# Altium PCB CW308T_AURIX.PcbDoc
Units mil, origin at the board's own origin, x right, y up, seen from the top; angles counter-clockwise.
Board outline 2055 x 2540 mil, 2 copper layers (Top Layer, Bottom Layer); 24 components, 26 nets, 219 pads, 121 vias.
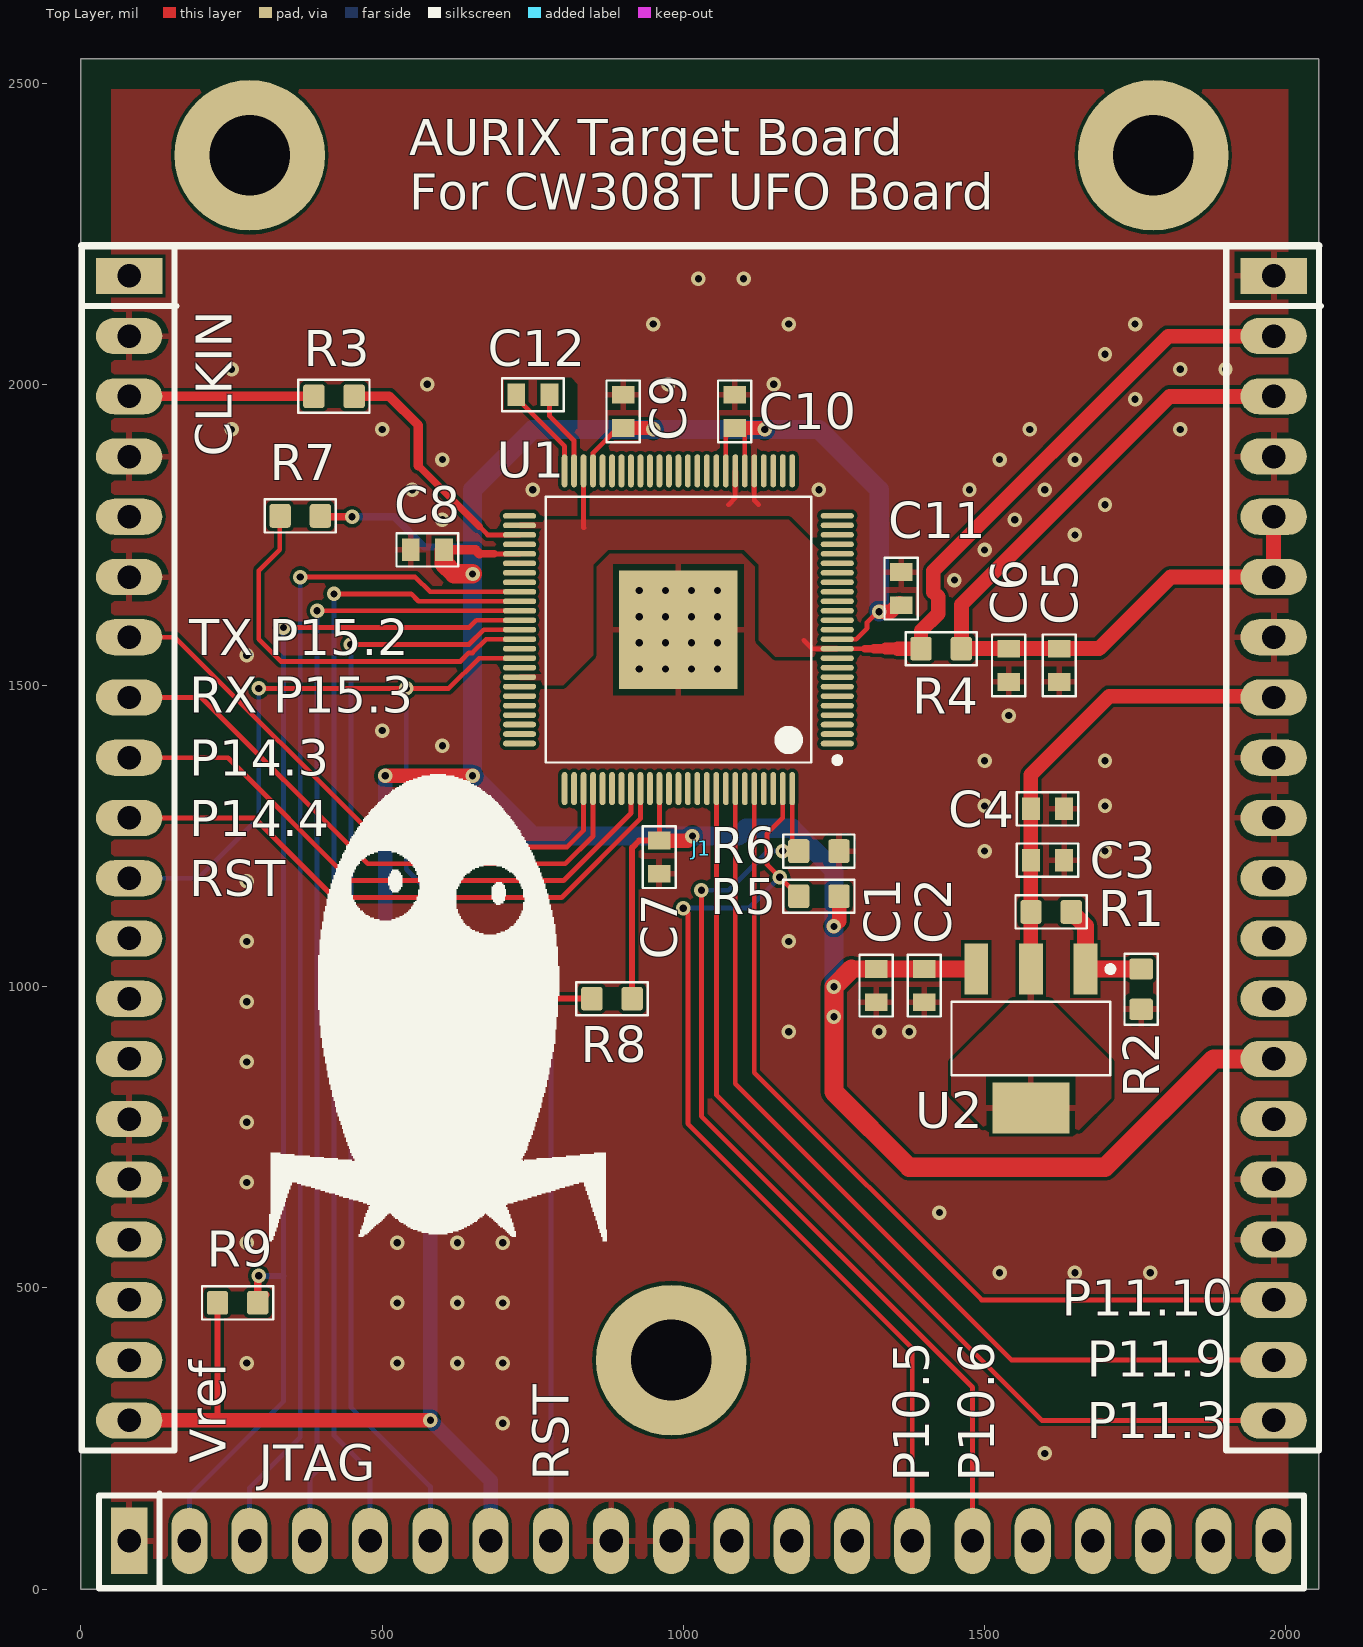
[diagram p0: Top Layer view]
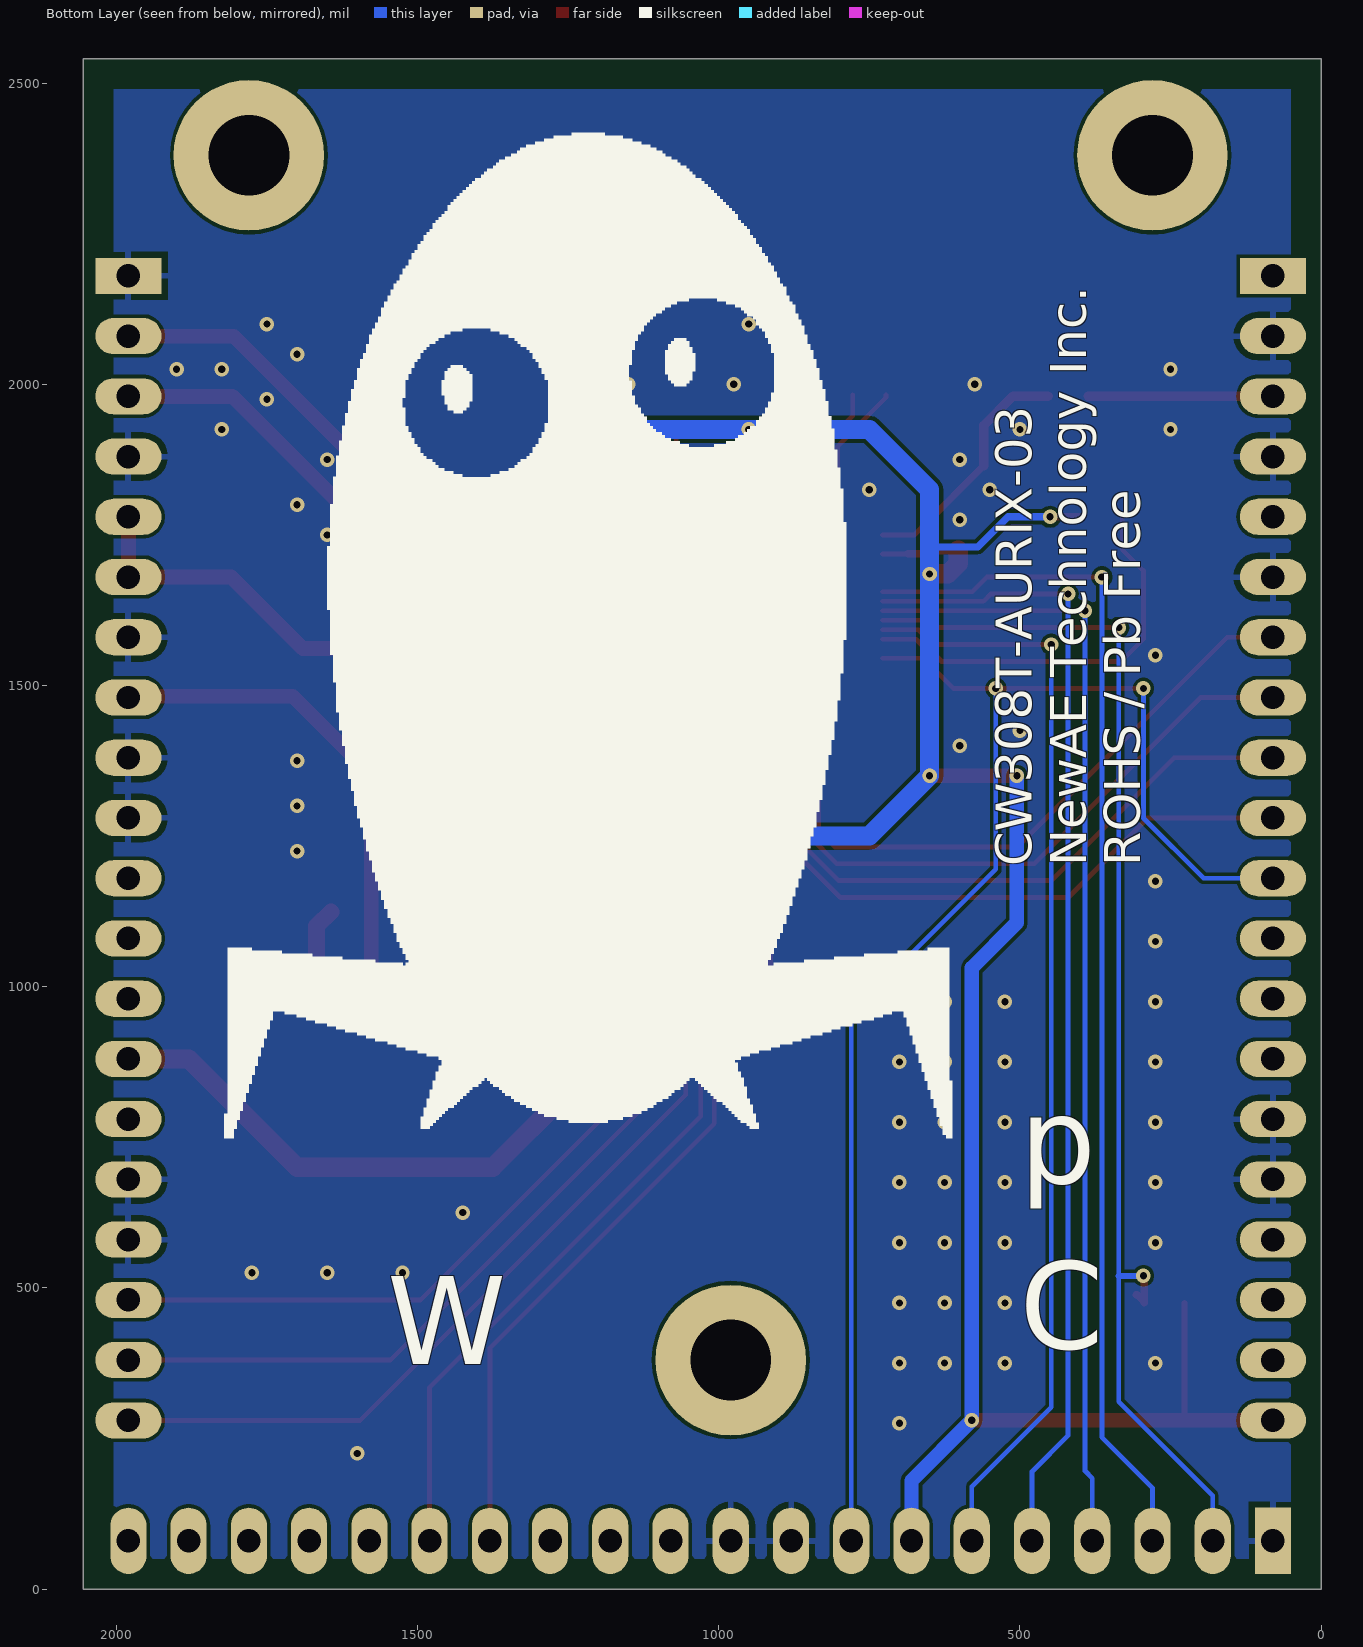
[diagram p1: Bottom Layer view, seen from below]

## Layer stack, top to bottom
Top Solder: solder mask 0.4, Solder Resist, Dk 3.5
Top Layer: signal copper 1.4
Dielectric 1: dielectric 12.6, FR-4, Dk 4.8
Bottom Layer: signal copper 1.4
Bottom Solder: solder mask 0.4, Solder Resist, Dk 3.5

## Board outline
0,0 2055,0 2055,2540 0,2540

## Design rules (kind name [scope] priority, off if disabled: settings)
BoardOutlineClearance Silk_to_Outline [(OnLayer('Top Overlay'))] p1: gap=0 ignorepadtopadclearanceinfootprint=FALSE
BoardOutlineClearance [All] p2: gap=50 ignorepadtopadclearanceinfootprint=FALSE
Clearance [All] p1: gap=6 ignorepadtopadclearanceinfootprint=FALSE except(0: Arc-Hole Track-Hole SMDPad-Hole THPad-Hole Via-Hole Fill-Hole Poly-Hole Region-Hole Text-Hole)
HoleSize [All] p1: absolutevalues=TRUE maxlimit=200 minlimit=1 maxpercent=80.000 minpercent=20.000
MinimumSolderMaskSliver [All] p1: minsoldermaskwidth=5
PlaneConnect PlaneConnect_viaDirect [IsVia] p1: planeconnectstyle=Direct reliefexpansion=20 reliefentries=4 reliefconductorwidth=10 reliefairgap=10
PlaneConnect [All] p2: planeconnectstyle=Relief reliefexpansion=20 reliefentries=4 reliefconductorwidth=10 reliefairgap=10
PolygonConnect PolygonConnect_1 [InNet('+1v3')] p1: connectstyle=Direct reliefconductorwidth=10 reliefentries=4 polygonreliefangle="90 Angle" airgapwidth=10
PolygonConnect PolygonConnect_viaDirect [All vs isVia] p2: connectstyle=Direct reliefconductorwidth=10 reliefentries=4 polygonreliefangle="90 Angle" airgapwidth=10
PolygonConnect [All] p3: connectstyle=Relief reliefconductorwidth=10 reliefentries=4 polygonreliefangle="90 Angle" airgapwidth=10
RoutingVias [All] p1: holewidth=28 width=50 viastyle="Through Hole" minholewidth=28 minwidth=50 maxholewidth=28 maxwidth=50 useviatemplates=TRUE viatemplateguid#1={9AA9326F-178A-41E1-B0FF-219260E0CFB2} viatemplateguid#2={C4BA5539-22F4-42F7-B53A-49D4B5D09D5C} viatemplateguid#3={5162F4C7-3166-4B30-8273-EF702488B20E} viatemplatename#1=v61h30m0mx0 viatemplatename#2=v86h41m0mx0 viatemplatename#3=v127h71m0mx0
SilkToSilkClearance [All] p1: silktosilkclearance=5
SilkToSolderMaskClearance [IsPad] p1: minsilkscreentomaskgap=5 clearancetoexposedcopper=TRUE
SolderMaskExpansion [All] p1: expansion=4
Width [All] p1: maxlimit=100 minlimit=6 preferedwidth=8 minimp=50.000000 maximp=50.000000 favimp=50.000000
25 further rules are at their usual default settings.

## Components (designator, comment, footprint, x,y, rotation, side; value= is the part's Value field where it differs from the comment)
C1 "2u2" CAPC0603_M 1320,1001.6 r270 top
C2 "2u2" CAPC0603_M 1400,1001.6 r270 top
C3 "2u2" CAPC0603_M 1604.56,1210 r0 top
C4 "2u2" CAPC0603_M 1604.56,1295 r0 top
C5 "2u2" CAPC0603_M 1624,1533.45 r270 top
C6 "100n" CAPC0603_M 1540,1533.45 r270 top
C7 "100n" CAPC0603_M 960,1215 r270 top
C8 "100n" CAPC0603_M 575,1725 r180 top
C9 "100n" CAPC0603_M 900,1955 r90 top
C10 "100n" CAPC0603_M 1085,1955 r90 top
C11 "100n" CAPC0603_M 1361.42,1660.72 r90 top
C12 "2u2" CAPC0603_M 750,1982.56 r180 top
J1 "CW308_TARGETCON" CW308_TBOARD_CONN 80,2180 r0 top locked
R1 "680R" RESC1608X55N 1610.46,1124 r0 top
R2 "120R" RESC1608X55N 1760,995.69 r270 top
R3 "22R" RESC1608X55N 420,1980 r180 top
R4 "5R1" RESC1608X55N 1428,1561.01 r180 top
R5 "10k" RESC1608X55N 1225,1150 r180 top
R6 "10k" RESC1608X55N 1225,1225 r180 top
R7 "10k" RESC1608X55N 364,1781.48 r0 top
R8 "10k" RESC1608X55N 881.54,980 r180 top
R9 "10k" RESC1608X55N 260,475 r0 top
U1 "TC233LP" PG-TQFP-100-23 991.78,1592.5 r180 top
U2 "LD1117SC-R" SOT-223 1577,914 r270 top

## Footprints (in the part's own frame and the unit in brackets; to place one, negate y for a bottom-side part, rotate by r counter-clockwise, add the part's x,y. Pads: shape width x height; smd on the part's side, far side on the other; paste and mask are expansions set on the pad)
CAPC0603_M [mm]
  rect 0.75x0.95 smd: 1(-0.7,0) 2(0.7,0)
  silkscreen extent -1.3,-0.7 1.3,0.7, body extent -0.85,-0.45 0.85,0.45, height 0.9
CW308_TBOARD_CONN [mil]
  rect 110x60 hole 39: A1(0,0) C1(1900,0)
  oval 110x60 hole 39: A2(0,-100) A3(0,-200) A4(0,-300) A5(0,-400) A6(0,-500) A7(0,-600) A8(0,-700) A9(0,-800) A10(0,-900) A11(0,-1000) A12(0,-1100) A13(0,-1200) A14(0,-1300) A15(0,-1400) A16(0,-1500) A17(0,-1600) A18(0,-1700) A19(0,-1800) A20(0,-1900) C2(1900,-100) C3(1900,-200) C4(1900,-300) C5(1900,-400) C6(1900,-500) C7(1900,-600) C8(1900,-700) C9(1900,-800) C10(1900,-900) C11(1900,-1000) C12(1900,-1100) C13(1900,-1200) C14(1900,-1300) C15(1900,-1400) C16(1900,-1500) C17(1900,-1600) C18(1900,-1700) C19(1900,-1800) C20(1900,-1900)
  rect 60x110 hole 39: B1(0,-2100)
  oval 60x110 hole 39: B2(100,-2100) B3(200,-2100) B4(300,-2100) B5(400,-2100) B6(500,-2100) B7(600,-2100) B8(700,-2100) B9(800,-2100) B10(900,-2100) B11(1000,-2100) B12(1100,-2100) B13(1200,-2100) B14(1300,-2100) B15(1400,-2100) B16(1500,-2100) B17(1600,-2100) B18(1700,-2100) B19(1800,-2100) B20(1900,-2100)
  round 250 hole 134: MH1(200,200) MH2(900,-1800) MH2(1700,200)
  silkscreen extent -79,-2179 1979,50, body extent -50,-2149 1950,50, height 48
PG-TQFP-100-23 [mm] "TSQFP, 100-Leads, Body 12.00x12.00mm, Pitch 0.40mm, Thermal Pad 5.00x5.00mm, IPC Medium Density"
  oval 1.4x0.24 smd paste-0.038: 1(-6.7,4.8) 2(-6.7,4.4) 3(-6.7,4) 4(-6.7,3.6) 5(-6.7,3.2) 6(-6.7,2.8) 7(-6.7,2.4) 8(-6.7,2) 9(-6.7,1.6) 10(-6.7,1.2) 11(-6.7,0.8) 12(-6.7,0.4) 13(-6.7,0) 14(-6.7,-0.4) 15(-6.7,-0.8) 16(-6.7,-1.2) 17(-6.7,-1.6) 18(-6.7,-2) 19(-6.7,-2.4) 20(-6.7,-2.8) 21(-6.7,-3.2) 22(-6.7,-3.6) 23(-6.7,-4) 24(-6.7,-4.4) 25(-6.7,-4.8) 51(6.7,-4.8) 52(6.7,-4.4) 53(6.7,-4) 54(6.7,-3.6) 55(6.7,-3.2) 56(6.7,-2.8) 57(6.7,-2.4) 58(6.7,-2) 59(6.7,-1.6) 60(6.7,-1.2) 61(6.7,-0.8) 62(6.7,-0.4) 63(6.7,0) 64(6.7,0.4) 65(6.7,0.8) 66(6.7,1.2) 67(6.7,1.6) 68(6.7,2) 69(6.7,2.4) 70(6.7,2.8) 71(6.7,3.2) 72(6.7,3.6) 73(6.7,4) 74(6.7,4.4) 75(6.7,4.8)
  oval 0.24x1.4 smd paste-0.038: 26(-4.8,-6.7) 27(-4.4,-6.7) 28(-4,-6.7) 29(-3.6,-6.7) 30(-3.2,-6.7) 31(-2.8,-6.7) 32(-2.4,-6.7) 33(-2,-6.7) 34(-1.6,-6.7) 35(-1.2,-6.7) 36(-0.8,-6.7) 37(-0.4,-6.7) 38(0,-6.7) 39(0.4,-6.7) 40(0.8,-6.7) 41(1.2,-6.7) 42(1.6,-6.7) 43(2,-6.7) 44(2.4,-6.7) 45(2.8,-6.7) 46(3.2,-6.7) 47(3.6,-6.7) 48(4,-6.7) 49(4.4,-6.7) 50(4.8,-6.7) 76(4.8,6.7) 77(4.4,6.7) 78(4,6.7) 79(3.6,6.7) 80(3.2,6.7) 81(2.8,6.7) 82(2.4,6.7) 83(2,6.7) 84(1.6,6.7) 85(1.2,6.7) 86(0.8,6.7) 87(0.4,6.7) 88(0,6.7) 89(-0.4,6.7) 90(-0.8,6.7) 91(-1.2,6.7) 92(-1.6,6.7) 93(-2,6.7) 94(-2.4,6.7) 95(-2.8,6.7) 96(-3.2,6.7) 97(-3.6,6.7) 98(-4,6.7) 99(-4.4,6.7) 100(-4.8,6.7)
  rect 5x5 smd paste-10: 101(0,0)
  silkscreen extent -6.83,-5.6 5.6,5.62, body extent -7,-7 7,7, height 1.2
RESC1608X55N [mm] "Chip Resistor, Body 1.6x0.8mm, EIA 0603, IPC Medium Density"
  round 0.254 on Mech15: 0(0,0)
  rrect25% 0.9x1 smd: 1(-0.85,0) 2(0.85,0)
  Top Layer pour cut-out: -0.6,0.5 0.6,0.5 0.6,-0.5 -0.6,-0.5
  silkscreen extent -1.5,-0.7 1.5,0.7, body extent -0.87,-0.47 0.88,0.48, height 0.54
SOT-223 [mm] "SOT223, 4-Leads, Body 6.50x7.00mm (avg), Pitch 2.30mm, IPC Medium Density"
  rect 2.15x1 smd: 1(-2.925,2.3) 2(-2.925,0) 3(-2.925,-2.3)
  rect 2.15x3.25 smd: 4(2.925,0)
  silkscreen extent -3.05,-3.35 1.55,3.48, body extent -3.5,-3.35 3.5,3.35, height 1.8

## Part data
C1 C2 C3 C4 C5 C12: library part CCHIP-2u2-0603, "2u2, 0603", Case-EIA=0603, Case-Metric=1608, Manufacture 1=Samsung, Manufacture Part Number 1=CL10B225KP8NNNC, Rated Voltage=10VDC, Supplier Part Number 1=1276-1134-2-ND, Component Group=Capacitor, Component Type=Standard, Mounting Technology=SMT, Part Number=CCHIP-2u2-0603, Pin Count=2, Supplier 1=Digi-Key
C6 C7 C8 C9 C10 C11: library part CCHIP-100n-0603, "100n, 0603", Case-EIA=0603, Case-Metric=1608, Manufacture 1=Kemet, Manufacture Part Number 1=C0603C104K5RACTU, Rated Voltage=50VDC, Supplier Part Number 1=399-5089-2-ND, Component Group=Capacitor, Component Type=Standard, Mounting Technology=SMT, Part Number=CCHIP-100n-0603, Pin Count=2, Supplier 1=Digi-Key
J1: library part CW308_TBOARD, "CW308 \"Standard\" Target Board Connector", Component Group=Mechanical, Component Type=Standard, Mounting Technology=Through-hole, Part Number=CW308_TBOARD, Pin Count=60, Pitch=2.54mm
R1: library part RCHIP-680R-0603, "680R res, 0603, 1%, 1/10W", Case-EIA=0603, Case-Metric=1608, Manufacture 1=Yageo, Manufacture Part Number 1=RC0603FR-07680RL, Rated Power=0.1W, Rated Voltage=75VDC, Supplier Part Number 1=311-680HRCT-ND, Temperature Range="-55C to 155C", Tolerance=1%, Component Group=Resistor, Component Type=Standard, Mounting Technology=SMT, Part Number=RCHIP-680R-0603, Pin Count=2, Supplier 1=Digi-Key
R2: library part RCHIP-120R-0603, "120R res, 0603, 1%, 1/10W", Case-EIA=0603, Case-Metric=1608, Manufacture 1=Yageo, Manufacture Part Number 1=RC0603FR-07120RL, Rated Power=0.1W, Rated Voltage=75VDC, Supplier Part Number 1=311-120HRCT-ND, Temperature Range="-55C to 155C", Tolerance=1%, Component Group=Resistor, Component Type=Standard, Mounting Technology=SMT, Part Number=RCHIP-120R-0603, Pin Count=2, Supplier 1=Digi-Key
R3: library part RCHIP-22R-0603, "22R res, 0603, 1%, 1/10W", Case-EIA=0603, Case-Metric=1608, Manufacture 1=Yageo, Manufacture Part Number 1=RC0603FR-0722RL, Rated Power=0.1W, Rated Voltage=75VDC, Supplier Part Number 1=311-22.0HRCT-ND, Temperature Range="-55C to 155C", Tolerance=1%, Component Group=Resistor, Component Type=Standard, Mounting Technology=SMT, Part Number=RCHIP-22R-0603, Pin Count=2, Supplier 1=Digi-Key
R4: library part RCHIP-5R1-0603, "5R1 res, 0603, 1%, 1/10W", Case-EIA=0603, Case-Metric=1608, Manufacture 1=Yageo, Manufacture Part Number 1=RC0603FR-075R1L, Rated Power=0.1W, Rated Voltage=75VDC, Supplier Part Number 1=YAG3372CT-ND, Temperature Range="-55C to 155C", Tolerance=1%, Component Group=Resistor, Component Type=Standard, Mounting Technology=SMT, Part Number=RCHIP-5R1-0603, Pin Count=2, Supplier 1=Digi-Key
R5 R6 R7 R8 R9: library part RCHIP-10K-0603, "10k res, 0603, 1%, 1/10W", Case-EIA=0603, Case-Metric=1608, Manufacture 1=Yageo, Manufacture Part Number 1=RC0603FR-0710KL, Rated Power=0.1W, Rated Voltage=75VDC, Supplier Part Number 1=311-10.0KHRCT-ND, Temperature Range="-55C to 155C", Tolerance=1%, Component Group=Resistor, Component Type=Standard, Mounting Technology=SMT, Part Number=RCHIP-10K-0603, Pin Count=2, Supplier 1=Digi-Key
U1: "IC MCU 32BIT 2MB FLASH 100TQFP", Manufacture 1="Infineon Technologies", Manufacture Part Number 1=TC233LP32F200FABKXUMA1, Supplier Part Number 1=TC233LP32F200FABKXUMA1CT-ND, Component Group="Digital IC", Component Type=Standard, Mounting Technology=SMT, Part Number=TC233LP, Pin Count=100, PP Material Stack=0, PP Rotation=0, RoHS=Yes, Supplier 1=Digi-Key

## Via types
v1: diameter 24, hole 12, Top Layer to Bottom Layer, tented both sides, 105 vias
v2: diameter 19.68, hole 12, Top Layer to Bottom Layer, 16 vias

## Nets (pads, with @x,y where several pads share a name; then routed paths per layer and width w, separated by ;. In a path a pad name is that pad's centre, name@x,y a point inside that pad or via, vN(x,y) a via of type N, cw(c..) or ccw(c..) an arc to the next point about the centre after c; other vN are vias at no path point)
+1v5: C3.1 C4.1 J1.C8 R1.1 U2.2 U2.4 | length 780.7
  Top Layer w24: U2.2 R1.1 C3.1 C4.1 1577,1352 1707.27,1482.27 1977.73,1482.27 J1.C8
+3v3: C1.1 C2.1 C7.1 C8.1 C9.1 C10.1 C11.1 J1.A20 J1.B7 J1.C14 R5.1 R7.2 R8.1 R9.1 U1.12 U1.31 U1.33 U1.47 U1.55 U1.86 U2.3 | length 7281.1
  Top Layer w8: 686.51,1718.49 U1.55 ; U1.47 850.05,1886.05 891.44,1927.44 C9.1 ; C7.1 960.28,1242.84 U1.86 ; U1.33 1070.52,1912.96 C10.1 ; U1.31 1102.02,1924.46 1105,1927.44 ; U1.12 1286.76,1576.76 1305,1595 1305,1605 1322.44,1622.44 v1(1325,1622.44)
  Top Layer w10: 220,280 226.54,286.54 R9.1 ; 308.46,278.46 310,280 ; R8.1 915.01,1230.91 926.66,1242.56 C7.1
  Top Layer w12: R7.2 398.94,1780 v1(450,1780) ; 661.51,1718.49 686.51,1718.49
  Top Layer w16: C8.1 655,1725 661.51,1718.49
  Top Layer w24: J1.A20 220,280 310,280 v1(580,280) ; v1(505,1350) v1(650,1350) ; C9.1 947.56,1927.44 v1(950,1925) ; C7.1 1007.56,1242.56 v1(1015,1250) ; C10.1 1105,1927.44 1132.56,1927.44 v1(1135,1925) ; v1(1250,1100) 1258.46,1108.46 R5.1 ; v1(1325,1622.44) 1344.37,1622.44 C11.1@1358.25,1636.33
  Top Layer w28: 1279.16,1029.16 C1.1 C2.1 U2.3
  Top Layer w32: C8.1 602.56,1702.44 619.5,1685.5 v1@650,1685.5 ; 1279.16,1029.16 v1(1250,1000) v1(1250,950) 1250,825 1375,700 1700,700 1880,880 J1.C14
  Bottom Layer w12: v1(450,1780) 520,1780 570,1730 650,1730
  Bottom Layer w24: v1(505,1350) 505,1106.03 580,1031.03 v1(580,280) 680,180 J1.B7
  Bottom Layer w32: v1(1250,950) v1(1250,1000) v1(1250,1100) 1250,1193.74 1180.74,1263 1104.37,1263 1091.37,1250 v1(1015,1250) 750,1250 v1(650,1350) v1(650,1685) 650,1730 650,1825 750,1925 v1(950,1925) v1(1135,1925) 1225,1925 1325,1825 v1(1325,1622.44)
CLKIN: J1.A3 R3.2 | length 306.5
  Top Layer w16: J1.A3 R3.2
CLKPIN: R3.1 U1.53 | length 409.1
  Top Layer w8: 661,1764 675.02,1749.98 U1.53
  Top Layer w12: 560,1865 661,1764
  Top Layer w16: R3.1 512,1980 560,1932 560,1865
GND: C1.2 C2.2 C3.2 C4.2 C5.2 C6.2 C7.2 C8.2 C9.2 C10.2 C11.2 J1.A2 J1.A4 J1.A6 J1.A15 J1.A16 J1.B1 J1.B9 J1.B10 J1.C1 J1.C4 J1.C7 J1.C9 J1.C10 J1.C16 J1.C17 R2.2 R6.1 U1.30 U1.32 U1.101 | length 120.2
  Top Layer w8: 1075,1800 1086.27,1811.27 U1.32 ; U1.30 1117.76,1807.24 1125,1800
  other v1: 1600,225 700,275 275,375 525,375 625,375 700,375 525,475 625,475 700,475 1525,525 1650,525 1775,525 275,575 525,575 625,575 700,575 1425,625 275,675 525,675 625,675 700,675 275,775 525,775 625,775 700,775 275,875 525,875 625,875 700,875 1175,925 1325,925 1375,925 275,975 525,975 625,975 700,975 275,1075 1175,1075 275,1175 1500,1225 1700,1225 1500,1300 1700,1300 1500,1375 1700,1375 600,1400 500,1425 1540,1450 275,1550 1450,1675 1500,1725 1650,1750 600,1775 1550,1775 1700,1800 550,1825 750,1825 1225,1825 1475,1825 1600,1825 600,1875 1525,1875 1650,1875 250,1925 500,1925 1575,1925 1825,1925 1750,1975 575,2000 975,2000 1150,2000 250,2025 1825,2025 1900,2025 1700,2050 950,2100 1175,2100 1750,2100 1025,2175 1100,2175
  other v2: 926.82,1527.54 970.13,1527.54 1013.43,1527.54 1056.74,1527.54 926.82,1570.85 970.13,1570.85 1013.43,1570.85 1056.74,1570.85 926.82,1614.16 970.13,1614.16 1013.43,1614.16 1056.74,1614.16 926.82,1657.46 970.13,1657.46 1013.43,1657.46 1056.74,1657.46
GPIO3: J1.A9 U1.83 | length 1004.6
  Top Layer w8: J1.A9 244,1380 448,1176 801,1176 913.04,1288.04 U1.83
GPIO4: J1.A10 U1.84 | length 1007.6
  Top Layer w8: J1.A10 288,1280 420,1148 798,1148 928.79,1278.79 U1.84
HWCFG4: J1.B14 R5.2 U1.99 | length 1600.5
  Top Layer w8: v1(1000,1130.31) 1007.56,1122.76 1007.56,772.44 1380,400 J1.B14 ; U1.99 1165.01,1280.01 1138.59,1253.59 1138.59,1202.95 v1(1160,1181.54) R5.2
  Bottom Layer w8: v1(1000,1130.31) 1108.78,1130.31 v1(1160,1181.54)
HWCFG5: J1.B15 R6.2 U1.100 | length 1563
  Top Layer w8: v1(1030,1160) 1030,785 1480,335 J1.B15 ; v1(1165,1225) R6.2 1180.76,1235.78 U1.100
  Bottom Layer w8: v1(1030,1160) 1075,1160 1140,1225 v1(1165,1225)
LED1: J1.C18 U1.96 | length 1490
  Top Layer w8: U1.96 1117.76,857.24 1495,480 J1.C18
LED2: J1.C19 U1.94 | length 1573.7
  Top Layer w8: U1.94 1086.27,838.73 1545,380 J1.C19
LED3: J1.C20 U1.92 | length 1657.5
  Top Layer w8: U1.92 1054.77,820.23 1595,280 J1.C20
NetC5_1: C5.1 C6.1 J1.C3 J1.C5 J1.C6 R4.1 | length 1402.7
  Top Layer w25: J1.C5 J1.C6 1809.14,1680 1690.15,1561.01 C5.1 C6.1 R4.1 1461.46,1634 1807.47,1980 J1.C3
NetC12_1: C12.1 U1.49 | length 143.3
  Top Layer w8: C12.1 777.56,1947.44 818.3,1906.7 818.3,1856.54 U1.49
NetC12_2: C12.2 U1.50 | length 159.6
  Top Layer w8: C12.2 722.44,1977.56 802.8,1897.2 U1.50
NetR1_2: R1.2 R2.1 U2.1 | length 197.1
  Top Layer w28: R1.2 1667.55,1100.38 U2.1 R2.1
NetR7_1: R7.1 U1.64 | length 682.9
  Top Layer w8: R7.1 330,1780.94 330,1725.62 295,1690.62 295,1576.76 331.76,1540 630,1540 644,1554 649.8,1554 672.55,1576.76 U1.64
RST: J1.A11 J1.B8 R8.2 U1.66 | length 2517.7
  Top Layer w8: v1(295,1495) v1(540,1495) 610.6,1495 660.86,1545.26 U1.66
  Top Layer w10: v1(770,980) R8.2
  Bottom Layer w8: J1.A11 195,1180 295,1280 v1(295,1495) ; v1(540,1495) 540,1195 780,955 J1.B8
RX: J1.A8 U1.79 | length 982.1
  Top Layer w8: J1.A8 200,1480 476,1204 804,1204 850.05,1250.05 U1.79
TCK: J1.B6 U1.63 | length 1832.8
  Top Layer w8: v1(448,1568) 644,1568 668.5,1592.5 U1.63
  Bottom Layer w8: v1(448,1568) 448,302 580,170 J1.B6
TDI: J1.B3 U1.59 | length 2008.9
  Top Layer w8: v1(364,1680) 555,1680 579.5,1655.5 U1.59
  Bottom Layer w8: J1.B3 280,168 364,252 v1(364,1680)
TDO: J1.B4 U1.61 | length 1885
  Top Layer w8: v1(392,1624) U1.61
  Bottom Layer w8: J1.B4 380,184 392,196 v1(392,1624)
TMS: J1.B5 U1.60 | length 1909.9
  Top Layer w8: v1(420,1652) 548,1652 560.25,1639.75 U1.60
  Bottom Layer w8: v1(420,1652) 420,255 480,195 J1.B5
TRST: J1.B2 R9.2 U1.62 | length 2082.9
  Top Layer w8: v1(336,1596) 644,1596 656.25,1608.25 U1.62
  Top Layer w12: R9.2 R9.2@293.46,476.97 ; v1(295,520) 293.46,518.46 R9.2@293.46,476.97 ; R9.2@307.15,488.69 305.18,488.69 R9.2@293.46,476.97
  Bottom Layer w8: J1.B2 180,155 336,311 336,520 v1(336,1596)
  Bottom Layer w10: v1(295,520) 336,520
TX: J1.A7 U1.78 | length 979.2
  Top Layer w8: J1.A7 156,1580 504,1232 807,1232 834.3,1259.3 U1.78
VCORE: J1.C2 R4.2 U1.11 U1.48 U1.52 U1.68 | length 1165.5
  Top Layer w8: U1.48 834.3,1762.29 834.79,1761.8 ; 1200,1575 1213.99,1561.01 U1.11 1301.01,1561.01
  Top Layer w12: 1301.01,1561.01 1316.01,1561.01
  Top Layer w16: 1316.01,1561.01 1336.01,1561.01
  Top Layer w20: 1336.01,1561.01 1356.01,1561.01
  Top Layer w24: 1356.01,1561.01 R4.2 1394.54,1590.76 1422.86,1619.08 1422.86,1647.25 1415,1655.1 1415,1690 1805,2080 J1.C2
pads on no net: J1.A1 J1.A5 J1.A12 J1.A13 J1.A14 J1.A17 J1.A18 J1.A19 J1.B11 J1.B12 J1.B13 J1.B16 J1.B17 J1.B18 J1.B19 J1.B20 J1.C11 J1.C12 J1.C13 J1.C15 J1.MH1 J1.MH2 R1.0 R2.0 R3.0 R4.0 R5.0 R6.0 R7.0 R8.0 R9.0 U1.1 U1.2 U1.3 U1.4 U1.5 U1.6 U1.7 U1.8 U1.9 U1.10 U1.13 U1.14 U1.15 U1.16 U1.17 U1.18 U1.19 U1.20 U1.21 U1.22 U1.23 U1.24 U1.25 U1.26 U1.27 U1.28 U1.29 U1.34 U1.35 U1.36 U1.37 U1.38 U1.39 U1.40 U1.41 U1.42 U1.43 U1.44 U1.45 U1.46 U1.51 U1.54 U1.56 U1.57 U1.58 U1.65 U1.67 U1.69 U1.70 U1.71 U1.72 U1.73 U1.74 U1.75 U1.76 U1.77 U1.80 U1.81 U1.82 U1.85 U1.87 U1.88 U1.89 U1.90 U1.91 U1.93 U1.95 U1.97 U1.98

## Polygon pours and split planes (outlines as drawn)
GND on Top Layer "GND_L01_P002" (solid, remove dead copper, pour order 2): 0,0 0,2540 2050,2540 2050,5 2055,0
VCORE on Top Layer "VCORE_L01_P001" (solid, remove dead copper, pour order 1): 750,1513.86 763.29,1500.58 800.58,1500.58 850,1550 850,1700 875,1725 1100,1725 1125,1700 1125,1575 1152.18,1547.82 1223.23,1547.82 1233.28,1557.86 1233.28,1716.72 1175,1775 750,1775
+1v5 on Top Layer "+1V5_L01_P000" (solid, remove dead copper, pour order 0): 1560,1050 1560,990 1445,875 1445,820 1510,755 1650,755 1710,815 1710,875 1595,990 1595,1050
GND on Bottom Layer "GND_L02_P006" (solid, remove dead copper, pour order 6): 0,2540 2055,2540 2055,0 0,0

## Other copper
Top Layer:
  pour cut-out: 802.32,2011.26 813.74,2011.26 825,2000 825,1925 775,1925

## Silkscreen, mask and mechanical layers (free items; w line width, h text height)
Top Overlay:
  drawing of 4 lines, arcs and shapes, not listed
  text "AURIX Target Board / For CW308T UFO Board" at 545,2290 h60
  text "CLKIN" at 250,1880 h60 r90
  text "TX P15.2" at 180,1550 h60
  text "RX P15.3" at 180,1455 h60
  text "P14.3" at 180,1350 h60
  text "P14.4" at 180,1250 h60
  text "RST" at 180,1150 h60
  text "P11.10" at 1628,454 h60
  text "P11.9" at 1670,352 h60
  text "P11.3" at 1670,250 h60
  text "Vref" at 240,210 h60 r90
  text "JTAG" at 295,180 h60
  text "RST" at 810,180 h60 r90
  text "P10.5" at 1408.44,178 h60 r90
  text "P10.6" at 1516,178 h60 r90
Bottom Overlay:
  drawing of 3 lines, arcs and shapes, not listed
  text "CW308T-AURIX-03 / NewAE Technology Inc. / ROHS / Pb Free" at 300,1200 h60 r270
  text "p" at 500,625 h250
  text "C" at 500,350 h250
  text "W" at 1550,325 h250
Mechanical 1:
  the board outline again, w10